# EAGLE board qwiic-environment (EAGLE 9.6.2)
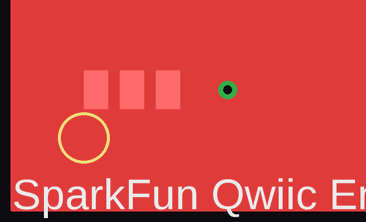
[diagram p0: board, top side]
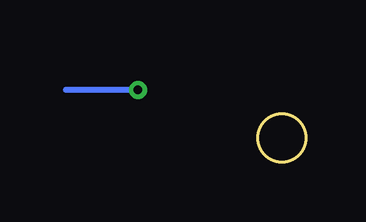
[diagram p1: board, bottom side, seen from below]

Size 2 x 2 mm. Coordinates in mm from the lower left corner, seen from the top.
Outline: circle at 1,1 radius 1
Copper layers used: layer 1, layer 16

## Footprints (pad centres in the part's own frame; a part is rotated, then mirrored left to right if it is on the bottom)
QWIIC = smd 1 x 1.6: 1 -1.5,0; 2 0,0; 3 1.5,0

## Placement (x,y rotation side)
J1  QWIIC  [JST04]  10,3 0 top
U1  BME280  [QWIIC]  3,3 0 top

## Library data of the parts
J1 = SparkFun-Connectors
U1 = SparkFun-Sensors

## Nets
SCL: J1.3 U1.2
SDA: J1.2 U1.1

## Tracks (layer width: path | path; a pad name or v marks a point on that pad's centre or on a via)
SCL
  layer 1 0.254: 3,4 10,4
SDA  (via drill 0.35)
  layer 1 0.254: 3,3 v7,3
  layer 16 0.254: v7,3 10,3
(copper drawn outside any net)
  shapes: layer 1 area x1

## Text on the board
layer 21: SparkFun Qwiic Environment